# Altium PCB ESP_mudule.pcbdoc (part 3 of 4)
Units mm, origin at the board's own origin, x right, y up, seen from the top; angles counter-clockwise.
Board outline 109.8 x 135.65 mm, 2 copper layers (Top Layer, Bottom Layer); 176 components, 188 nets, 748 pads, 392 vias.
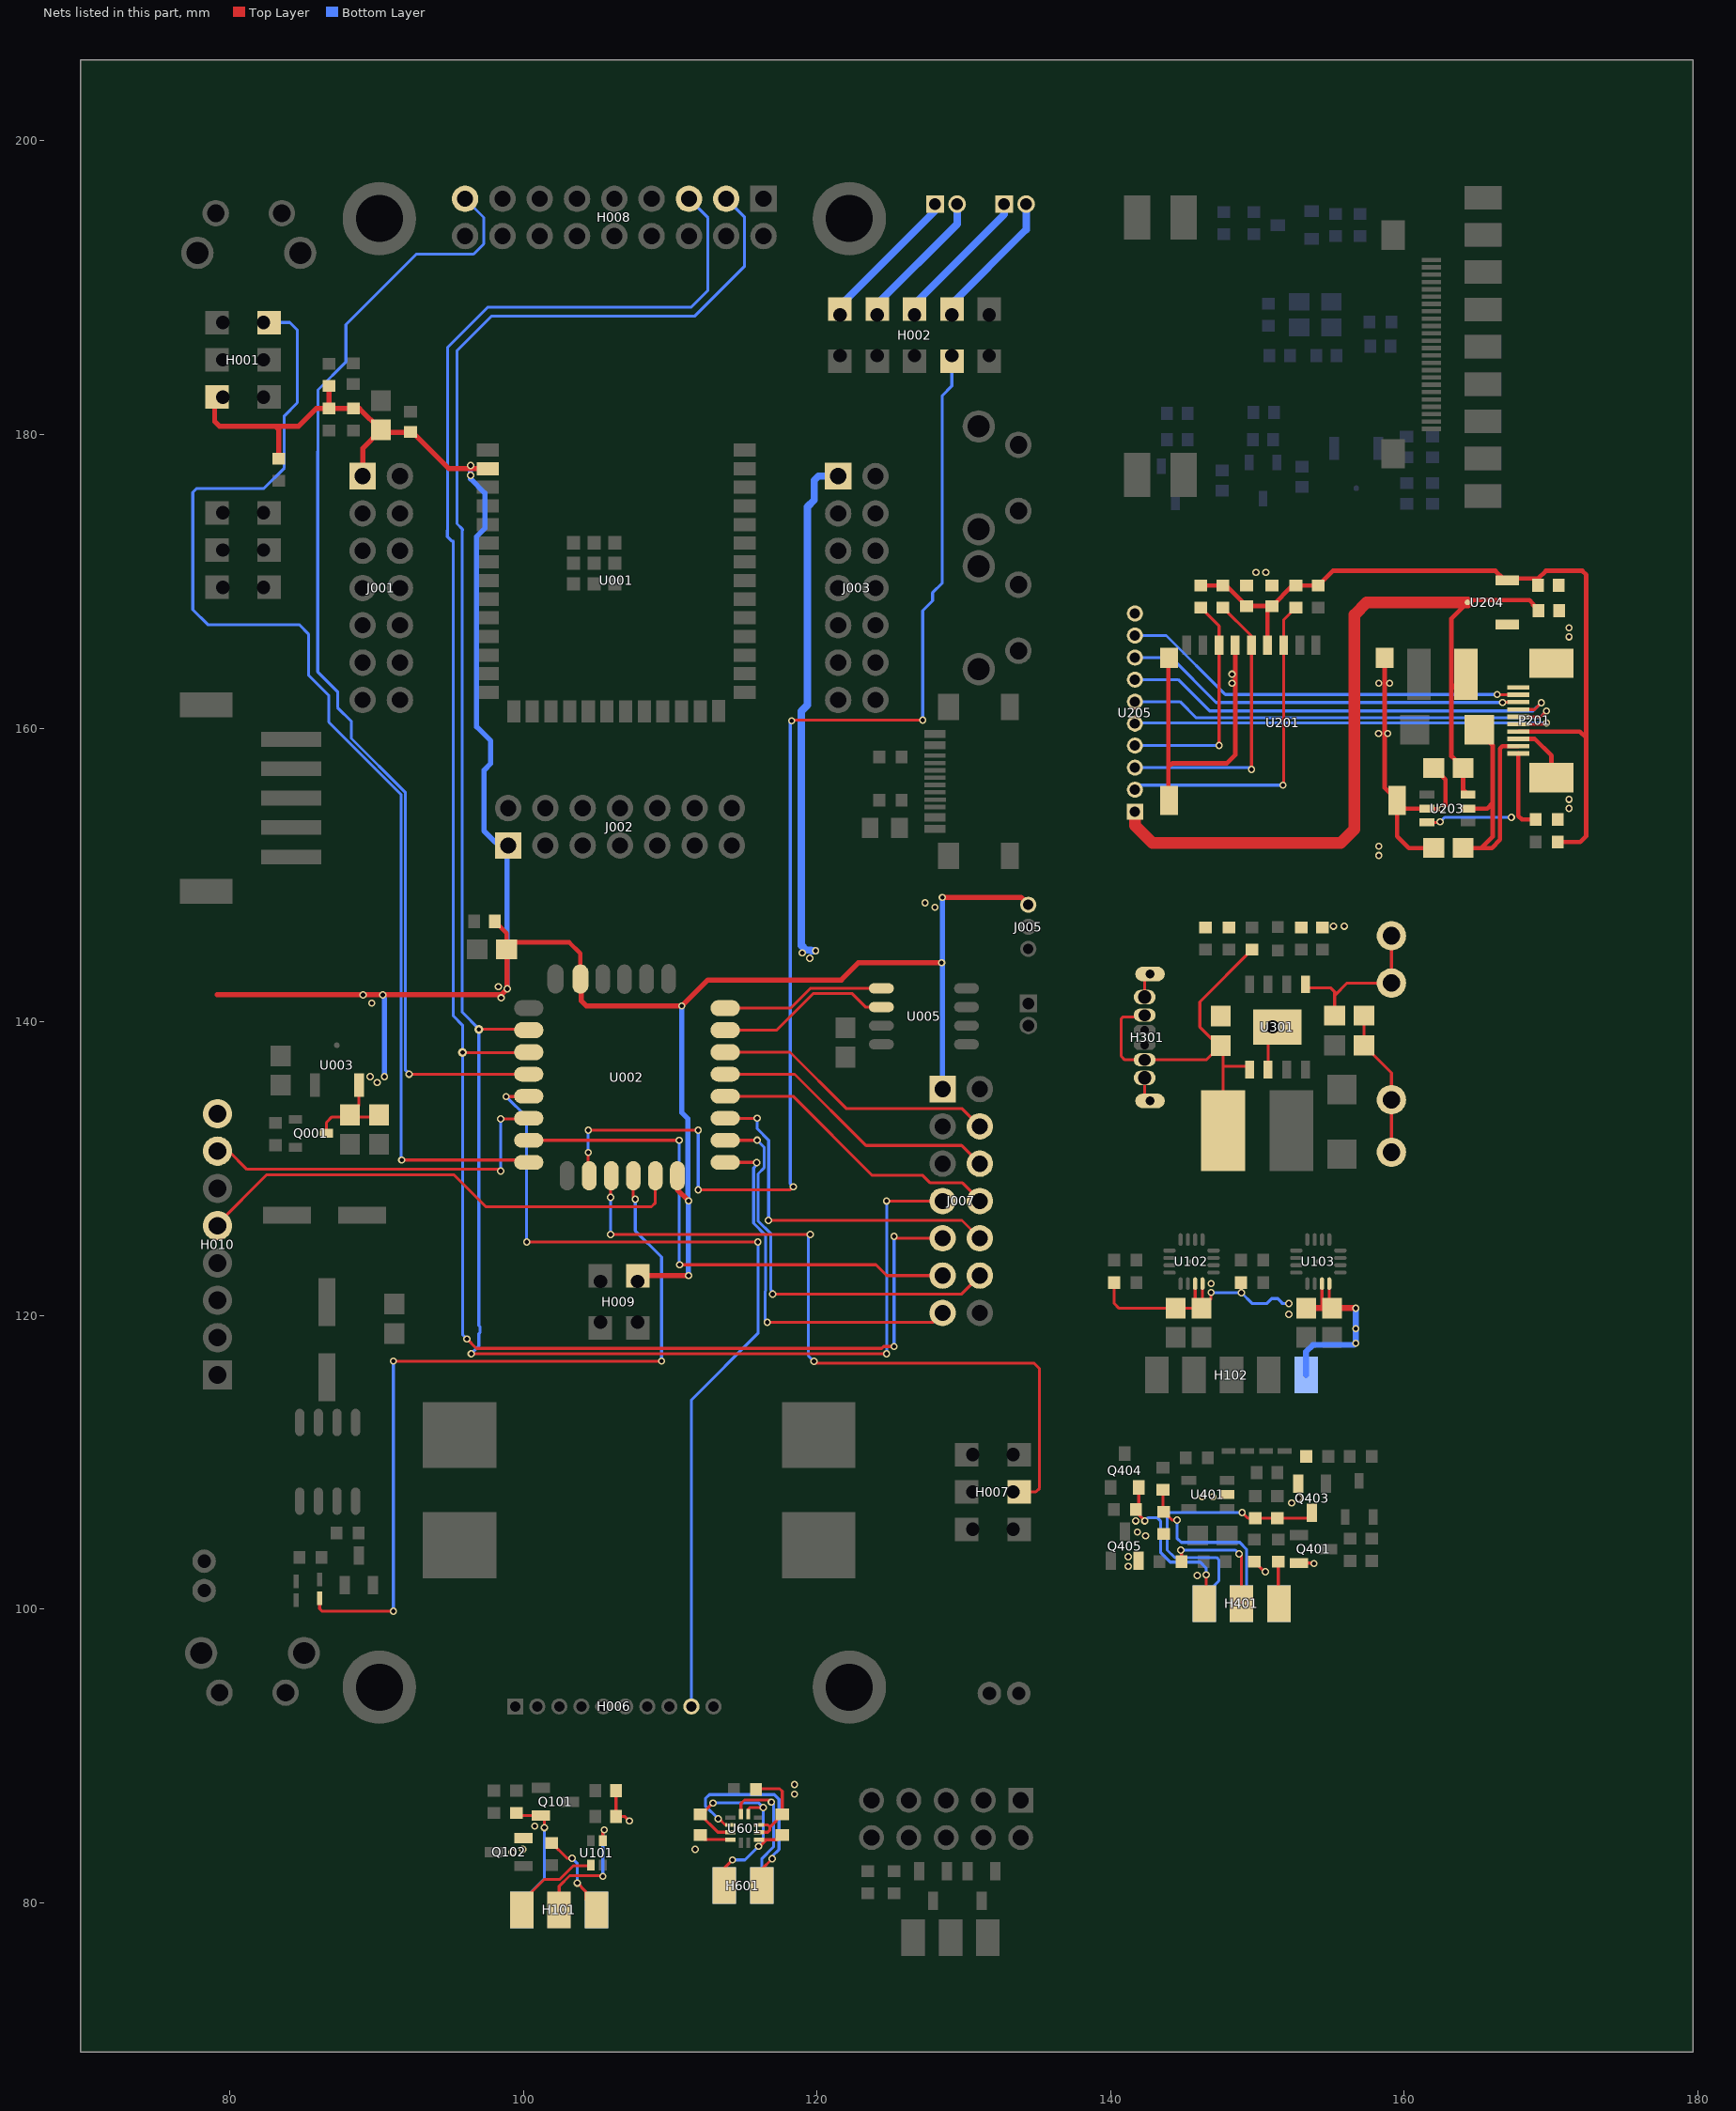
[diagram p3: the nets of this part, all layers, seen from the top]

## Via types
v1: diameter 0.5, hole 0.305, Top Layer to Bottom Layer, 390 vias
v2: diameter 0.61, hole 0.305, Top Layer to Bottom Layer, 2 vias

## Nets (pads, with @x,y where several pads share a name; then routed paths per layer and width w, separated by ;. In a path a pad name is that pad's centre, name@x,y a point inside that pad or via, vN(x,y) a via of type N, cw(c..) or ccw(c..) an arc to the next point about the centre after c; other vN are vias at no path point) (continued)
HT517_VCC: C103.2 C104.2 C105.2 C106.2 H102.10 R105.2 R107.2 U102.7 U102.8 U103.7 U103.8 | length 33.3
  Top Layer w0.2: R105.2@140.235,122.253 140.235,120.826 140.55,120.512 C103.2@144.418,120.512 C104.2@146.196,120.512 ; U102.7@145.755,122.175 145.755,120.953 C104.2@146.196,120.512 ; U102.8@146.255,122.175 C104.2@146.255,120.571 ; v1(146.835,121.57) 146.835,121.151 C104.2@146.255,120.571 ; R107.2@148.871,122.253 148.871,121.58 v1(148.899,121.552) ; 154.368,120.512 154.391,120.534 U103.7@154.391,122.175 ; U103.8@154.891,122.175 154.891,120.707 C106.2@155.086,120.512 ; C104.2@146.196,120.512 C104.2@146.255,120.571
  Top Layer w0.4: C105.2@153.308,120.512 154.368,120.512 C106.2@155.086,120.512 156.683,120.512 v1(156.695,120.499)
  Bottom Layer w0.2: v1(146.835,121.57) 146.853,121.552 v1(148.899,121.552) 149.623,120.828 150.668,120.828 150.668,120.86 150.963,121.154 151.378,121.154 151.672,120.86 151.672,120.828 v1(152.14,120.828)
  Bottom Layer w0.4: H102.10@153.308,115.949 153.308,117.537 153.772,118 156.577,118 v1(156.695,118.119) v1(156.695,119.11) v1(156.695,120.499)
  other v1: 152.14,120.091 146.835,122.182
I2S_EN: H002.7 U002.12 | length 87.3
  Top Layer w0.2: v1(104.422,131.103) 104.422,129.581 U002.12@104.491,129.512 ; v1(104.422,132.627) v1(111.915,132.627) ; v1(111.915,128.563) 118.178,128.563 v1(118.382,128.767) ; v1(118.279,160.503) 118.33,160.554 v1(127.202,160.554)
  Bottom Layer w0.2: v1(104.422,131.103) v1(104.422,132.627) ; v1(111.915,128.563) v1(111.915,132.627) ; v1(118.279,160.503) 118.182,160.406 118.182,128.967 v1(118.382,128.767) ; v1(127.202,160.554) 127.202,167.995 127.875,168.667 127.875,169.224 128.538,169.887 128.538,182.652 129.187,183.3 H002.7@129.187,184.971
INT_02: H008.3 J007.7 U002.4 | length 142.2
  Top Layer w0.2: v1(96.456,117.404) 124.731,117.404 v1(124.742,117.393) ; v2(96.978,139.49) 100.313,139.49 U002.4@100.371,139.432 ; v1(124.742,127.801) J007.7@128.552,127.801
  Bottom Layer w0.2: v1(96.456,117.404) 96.978,117.926 96.978,118.758 97.05,118.83 97.05,119.246 96.978,119.318 v2(96.978,139.49) 96.978,139.519 95.835,140.662 95.835,173.455 95.859,173.479 95.859,173.541 95.484,173.916 95.484,185.711 97.82,188.047 111.663,188.047 115.074,191.459 115.074,194.791 H008.3@113.82,196.045 ; v1(124.742,117.393) v1(124.742,127.801)
INT_03: H008.5 J007.9 U002.5 | length 139
  Top Layer w0.2: v2(95.864,137.909) 100.348,137.909 U002.5@100.371,137.932 ; v1(96.167,118.403) 96.802,117.768 124.407,117.768 124.534,117.895 v1(125.25,117.895) ; v1(125.25,125.388) 125.377,125.261 J007.9@128.552,125.261
  Bottom Layer w0.2: v1(96.167,118.403) 95.864,118.706 v2(95.864,137.909) 95.864,139.779 95.231,140.412 95.231,172.726 95.214,172.743 95.125,172.743 94.831,173.037 94.831,173.453 94.849,173.471 94.849,185.931 97.57,188.651 111.413,188.651 112.575,189.814 112.575,194.75 H008.5@111.28,196.045 ; v1(125.25,117.895) v1(125.25,125.388)
LCD_RESET: H006.9 U002.7 | length 61.3
  Top Layer w0.2: v1(98.834,134.913) 100.352,134.913 U002.7@100.371,134.932 ; v1(100.231,125.007) v1(115.979,125.007)
  Bottom Layer w0.2: v1(98.834,134.913) 100.231,133.516 v1(100.231,125.007) ; H006.9@111.45,93.385 111.45,114.256 115.979,118.784 v1(115.979,125.007)
METAL_ENABLE: H007.3 U002.13 | length 51.7
  Top Layer w0.2: v1(105.946,125.515) v1(119.535,125.515) ; v1(105.946,128.055) 105.946,129.468 U002.13@105.991,129.512 ; v1(119.789,116.883) 119.907,116.764 134.763,116.764 135.156,116.371 135.156,108.243 134.902,107.989 H007.3@133.759,107.989
  Bottom Layer w0.2: v1(105.946,125.515) v1(105.946,128.055) ; v1(119.535,125.515) 119.408,125.388 119.408,117.264 v1(119.789,116.883)
MIC_CLK: H101.3 U101.4 | length 8.9
  Top Layer w0.2: H101.3@102.442,79.53 102.442,81.139 103.164,81.861 105.366,81.861 v1(105.416,81.811) ; U101.4@105.421,84.248 105.421,84.88 v1(105.518,84.977)
  Bottom Layer w0.2: v1(105.416,81.811) 105.416,84.875 v1(105.518,84.977)
MIC_DAT: H101.1 U101.1 | length 6.3
  Top Layer w0.2: H101.1@99.902,79.53 99.902,80.078 101.438,81.614 102.49,81.614 103.416,82.54 104.563,82.54 U101.1@104.601,82.578
MIC_EN: H101.5 R103.2 | length 6
  Top Layer w0.2: R103.2@101.934,84.093 102.985,83.042 v1(103.325,83.042) ; v1(103.682,81.359) 104.243,80.798 104.243,80.269 H101.5@104.982,79.53
  Bottom Layer w0.2: v1(103.325,83.042) 103.682,82.685 v1(103.682,81.359)
MIC_GND: C101.1 C102.1 H101.6 Q102.2 | length 2.8
  Top Layer w0.2: C102.1@106.317,87.658 C101.1@106.317,85.88 106.92,85.88 v1(107.218,85.582)
  other v1: 99.231,83.467 99.959,83.654
MIC_VCC: H101.2 Q101.2 R101.2 | length 8.9
  Top Layer w0.2: R101.2@99.521,86.143 99.718,85.946 Q101.2@101.188,85.946 101.443,85.691 v1(101.443,85.133)
  Bottom Layer w0.2: H101.2@99.902,79.524 99.902,80.129 101.443,81.67 v1(101.443,85.133)
  other v1: 100.775,85.235
P0_CMA_LIGHT: H008.17 U002.6 | length 77.8
  Top Layer w0.2: v1(92.23,136.437) 92.235,136.432 U002.6@100.371,136.432
  Bottom Layer w0.2: v1(92.23,136.437) 91.976,136.691 91.976,155.614 88.293,159.297 88.293,160.463 87.356,161.4 87.356,162.486 86.007,163.835 86.007,178.832 86.021,178.846 86.021,183.037 87.926,184.942 87.926,187.482 92.72,192.275 96.617,192.275 97.31,192.968 97.31,194.775 H008.17@96.04,196.045
P2_3V3: C201.2 C205.2 C206.2 P201.4 R201.1 R202.2 R203.2 R204.2 R225.1 U201.4 U204.3 | length 56.4
  Top Layer w0.3: R204.2@146.131,169.711 R203.2@147.649,169.711 147.869,169.711 C206.2@149.267,168.314 C201.2@150.99,168.314 ; U201.4@150.682,165.638 150.682,168.006 C201.2@150.99,168.314 ; P201.4@167.757,159.768 171.951,159.768 172.386,159.333 ; C205.2@169.107,169.724 169.107,170.19 ; R225.1@170.437,152.243 171.978,152.243 172.386,152.651 172.386,159.333 ; C201.2@150.99,168.314 152.388,169.711 R201.1@154.132,169.711 155.135,170.715 166.206,170.715 166.731,170.19 169.107,170.19 ; 169.107,170.19 169.632,170.715 172.122,170.715 172.386,170.451 172.386,159.333
P2_5V0: C203.2 C204.2 L201.1 U203.6 U204.2 U205.1 | length 60
  Top Layer w0.3: L201.1@164.195,163.668 163.206,162.679 ; U203.6@164.337,155.477 164.002,155.811 C203.2@164.002,157.293 163.206,158.089 163.206,162.679 ; C204.2@169.134,168.01 168.765,168.378 168.765,168.462 168.515,168.712 164.447,168.712 U204.2@164.298,168.564 163.206,167.472 163.206,162.679
  Top Layer w0.8: U205.1@141.657,154.307 141.657,153.369 142.834,152.192 155.675,152.192 156.602,153.12 156.602,167.722 157.443,168.564 U204.2@164.298,168.564
P2_GND: C201.1 C202.1 C203.1 C204.1 C205.1 C206.1 P201.3 P201.10 P201.11 P201.12 R205.1 U201.6 U201.10 U201.11 U201.12 U201.13 U203.2 U204.1 U205.10 | length 48.2
  Top Layer w0.3: U201.11@143.982,155.084 143.933,155.134 143.933,157.348 ; U201.10@143.982,164.787 143.933,164.738 143.933,157.348 ; U201.6@148.483,165.638 148.483,158.175 147.906,157.599 144.183,157.599 143.933,157.348 ; U201.13@158.663,164.787 158.663,155.923 U201.12@159.501,155.084 ; C202.1@162.002,151.835 160.299,151.835 159.501,152.633 U201.12@159.501,155.084 ; C203.1@162.002,157.293 162.794,156.501 162.794,154.738 v1(162.543,154.488) 161.576,154.488 U203.2@161.537,154.527 160.059,154.527 U201.12@159.501,155.084 ; P201.3@167.757,159.268 168.881,159.268 170.017,158.132 P201.11@170.017,156.621
  other v1: 158.259,151.325 158.259,151.962 171.213,154.539 171.213,155.151 158.243,159.639 158.871,159.639 148.263,163.056 158.259,163.056 158.995,163.056 148.263,163.671 171.213,166.218 171.213,166.834 149.894,170.604 150.558,170.604
P2_LCD_ANODE: C202.2 D201.1 P201.2 U203.5 | length 20.9
  Top Layer w0.3: C202.2@164.002,151.835 165.246,151.835 ; U203.5@164.337,154.527 165.642,154.527 166.011,154.896 ; D201.1@165.1,159.894 165.1,159.734 166.011,158.823 166.011,154.896 ; P201.2@167.757,158.767 166.67,158.767 166.521,158.619 166.521,152.396 165.96,151.835 165.246,151.835 ; 165.246,151.835 166.011,152.6 166.011,154.896
P2_LCD_CATHODE: P201.1 R205.2 U203.3 | length 11.4
  Top Layer w0.2: U203.3@161.537,153.577 162.397,153.577 v1(162.441,153.621)
  Top Layer w0.3: P201.1@167.757,158.27 167.757,154.017 168,153.774 R205.2@168.93,153.774
  Bottom Layer w0.2: v1(162.441,153.621) 162.747,153.927 v1(167.286,153.927)
P2_LCD_CS: P201.8 U205.8 | length 27.4
  Top Layer w0.2: v1(166.694,161.746) 166.719,161.77 P201.8@167.757,161.77
  Bottom Layer w0.2: U205.8@141.657,164.805 144.117,164.805 147.176,161.746 v1(166.694,161.746)
P2_LCD_RESET: P201.9 U205.9 | length 27.8
  Top Layer w0.2: v1(166.317,162.291) 166.34,162.268 P201.9@167.757,162.268
  Bottom Layer w0.2: U205.9@141.657,166.306 143.788,166.306 147.804,162.291 v1(166.317,162.291)
P2_LCD_RS: P201.5 U205.5 | length 30
  Top Layer w0.2: P201.5@167.757,160.269 169.593,160.269 v1(169.683,160.359)
  Bottom Layer w0.2: U205.5@141.657,160.307 141.708,160.359 v1(169.683,160.359)
P2_LCD_SCL: P201.7 U205.7 | length 30.5
  Top Layer w0.2: P201.7@167.757,161.269 168.862,161.269 v1(169.324,161.732)
  Bottom Layer w0.2: U205.7@141.657,163.307 144.595,163.307 146.733,161.169 168.761,161.169 v1(169.324,161.732)
P2_LCD_SDA: P201.6 U205.6 | length 30.8
  Top Layer w0.2: P201.6@167.757,160.769 169.284,160.769 v1(169.683,161.169)
  Bottom Layer w0.2: U205.6@141.657,161.805 144.719,161.805 145.817,160.708 169.222,160.708 v1(169.683,161.169)
P2_SD_CLK: R203.1 U201.5 U205.3 | length 19.8
  Top Layer w0.2: R203.1@147.649,168.205 149.583,166.271 U201.5@149.583,165.638 149.589,165.632 v1(149.589,157.191)
  Bottom Layer w0.2: U205.3@141.657,157.307 149.473,157.307 v1(149.589,157.191)
P2_SD_CMD: R202.1 U201.3 U205.2 | length 22.7
  Top Layer w0.2: v1(151.731,156.12) 151.782,156.171 U201.3@151.782,165.638 151.782,167.373 R202.1@152.614,168.205
  Bottom Layer w0.2: U205.2@141.657,155.806 141.97,156.12 v1(151.731,156.12)
P2_SD_DAT: R204.1 U201.7 U205.4 | length 15.6
  Top Layer w0.2: R204.1@146.131,168.205 147.383,166.952 U201.7@147.383,165.638 v1(147.383,158.823)
  Bottom Layer w0.2: U205.4@141.657,158.806 141.674,158.823 v1(147.383,158.823)
P4_GND: H401.6 Q401.2 Q403.2 Q405.2 R405.1 R409.2 R414.1 U401.2 | length 2.1
  Top Layer w0.2: R409.2@149.784,103.244 150.477,102.551 v1(150.534,102.551) ; Q401.2@152.813,103.149 153.812,103.149 v1(153.849,103.112)
  other v1: 141.201,102.922 141.201,103.571 142.374,104.999 141.813,105.254 152.319,107.243 152.828,107.585 146.238,107.657 146.942,107.657
P4_L_CATHODE: H401.2 Q403.3 R406.1 R407.2 | length 19.9
  Top Layer w0.2: v1(148.953,106.589) 149.341,106.202 R406.1@149.835,106.202 R407.2@151.365,106.202 153.345,106.202 Q403.3@153.711,106.567
  Bottom Layer w0.2: H401.2@146.373,100.382 146.373,100.94 147.372,101.939 147.372,103.367 147.219,103.52 144.363,103.52 143.853,104.03 143.853,106.478 143.965,106.589 v1(148.953,106.589)
P4_METAL_ADC: H401.4 R413.1 R414.2 | length 12.8
  Top Layer w0.2: R413.1@143.562,108.14 143.562,106.688 R414.2@143.613,106.637 144.18,106.07 v1(144.516,106.07)
  Bottom Layer w0.2: v1(144.516,106.07) 144.516,104.846 144.808,104.555 148.788,104.555 149.259,104.084 149.259,100.728 H401.4@148.913,100.382
P4_METAL_EN: H401.3 R412.1 | length 8.4
  Top Layer w0.2: v1(144.771,104.03) 144.825,103.976 R412.1@144.825,103.232 ; v1(148.749,103.775) 148.913,103.611 H401.3@148.913,100.388
  Bottom Layer w0.2: v1(144.771,104.03) 148.494,104.03 v1(148.749,103.775)
P4_METAL_PULSE: H401.5 R401.1 | length 2.9
  Top Layer w0.2: R401.1@151.416,103.244 151.416,100.426 H401.5@151.453,100.388
P4_VCC: H401.1 Q404.2 R411.1 | length 12
  Top Layer w0.2: Q404.2@141.911,108.304 141.911,106.999 R411.1@141.714,106.802 141.714,106.628 v1(142.323,106.019) ; H401.1@146.373,100.388 146.505,100.521 v1(146.505,102.347)
  Bottom Layer w0.2: v1(142.323,106.019) 142.527,106.223 143.19,106.223 143.394,106.019 143.394,103.877 144.057,103.214 146.097,103.214 146.505,102.806 v1(146.505,102.347)
  other v1: 145.893,102.296 141.711,106.019
P6_3V3: C601.1 C602.2 H601.1 U601.3 U601.7 U601.11 | length 18.1
  Top Layer w0.2: v1(112.911,86.808) 112.125,86.021 C601.1@112.049,86.021 113.253,84.817 U601.3@114.096,84.817 ; H601.1@113.696,81.189 113.696,82.381 v1(114.248,82.933) ; U601.11@115.321,86.042 115.321,86.402 115.418,86.5 v1(116.342,86.5) ; v1(116.025,83.859) 116.107,83.859 116.557,84.31 ; U601.7@116.046,84.317 116.053,84.31 116.557,84.31 ; C602.2@117.637,84.621 117.326,84.31 116.557,84.31
  Bottom Layer w0.2: v1(112.911,86.808) 116.035,86.808 v1(116.342,86.5) 116.342,84.176 v1(116.025,83.859) 115.099,82.933 v1(114.248,82.933)
P6_GND: C601.2 C602.1 H601.2 R601.1 U601.4 U601.8 U601.9 | length 8.7
  Top Layer w0.2: C601.2@112.049,84.621 112.353,84.317 U601.4@114.096,84.317 ; R601.1@115.851,87.734 115.895,87.778 117.461,87.778 117.637,87.602 C602.1@117.637,86.021 116.798,85.182 116.798,85.177 ; U601.8@116.046,84.817 116.642,84.817 116.798,84.973 116.798,85.177 ; U601.9@116.046,85.317 116.658,85.317 116.798,85.177
  other v1: 111.698,83.647 118.47,87.412 118.47,88.073
PDM_EN: H001.5 U002.10 | length 82.5
  Top Layer w0.2: v1(91.722,130.595) 100.208,130.595 U002.10@100.371,130.432
  Bottom Layer w0.2: H001.5@82.705,187.618 84.102,187.618 84.61,187.11 84.61,182.157 83.721,181.268 83.721,177.712 82.324,176.315 77.752,176.315 77.498,176.061 77.498,168.067 78.52,167.044 84.737,167.044 85.372,166.409 85.372,163.615 86.752,162.235 86.752,160.411 91.674,155.489 91.674,130.643 v1(91.722,130.595)
POWER_LOCK: D001.2 U002.14 | length 54.5
  Top Layer w0.2: D001.2@86.134,100.75 86.134,100.039 86.31,99.863 v1(91.155,99.863) ; v1(91.155,116.897) v1(109.413,116.897) ; U002.14@107.491,129.512 107.491,128.051 v1(107.628,127.913)
  Bottom Layer w0.2: v1(91.155,99.863) v1(91.155,116.897) ; v1(107.628,127.913) 107.628,125.771 109.413,123.986 v1(109.413,116.897)
PWM_07: J007.11 U002.9 | length 36.9
  Top Layer w0.2: U002.9@100.371,131.932 v1(110.621,131.932) ; v1(110.645,123.46) 124.015,123.46 124.754,122.721 J007.11@128.552,122.721
  Bottom Layer w0.2: v1(110.621,131.932) 110.621,123.484 v1(110.645,123.46)
PWM_08: J007.13 U002.20 | length 25.7
  Top Layer w0.2: U002.20@113.751,130.432 115.883,130.432 v1(115.898,130.417) ; v1(116.614,119.546) 127.917,119.546 J007.13@128.552,120.181
  Bottom Layer w0.2: v1(115.898,130.417) 115.898,130.267 115.686,130.055 115.686,126.289 116.493,125.482 116.493,121.681 116.471,121.659 116.471,119.689 v1(116.614,119.546)
PWM_09: J007.12 U002.21 | length 28.1
  Top Layer w0.2: U002.21@113.751,131.932 115.935,131.932 v1(115.926,131.941) ; v1(116.973,121.451) 129.822,121.451 J007.12@131.092,122.721
  Bottom Layer w0.2: v1(115.926,131.941) 116.4,131.467 116.4,130.055 115.992,129.647 115.992,126.434 116.859,125.567 116.859,121.742 116.973,121.628 v1(116.973,121.451)
PWM_010: J007.10 U002.22 | length 24.4
  Top Layer w0.2: U002.22@113.751,133.432 115.917,133.432 v1(115.925,133.44) ; v1(116.686,126.485) 129.868,126.485 J007.10@131.092,125.261
  Bottom Layer w0.2: v1(115.925,133.44) 115.925,132.723 116.706,131.942 v1@116.706,126.465 ; v1(116.686,126.485) v1@116.706,126.465 ; v1@116.706,126.434 v1@116.706,126.465
PWM_011: J007.8 U002.23 | length 20.3
  Top Layer w0.2: U002.23@113.751,134.932 118.373,134.932 123.76,129.545 127.212,129.545 127.722,129.035 129.915,129.035 131.092,127.858 J007.8@131.092,127.801
PWM_012: J007.6 U002.24 | length 19.9
  Top Layer w0.2: U002.24@113.751,136.432 118.489,136.432 123.336,131.585 129.848,131.585 J007.6@131.092,130.341
PWM_013: J007.4 U002.25 | length 19.4
  Top Layer w0.2: U002.25@113.751,137.932 118.162,137.932 122.01,134.084 129.889,134.084 J007.4@131.092,132.881
PWM_014: U002.26 U005.2 | length 12.1
  Top Layer w0.2: U002.26@113.751,139.432 117.26,139.432 119.766,141.938 122.367,141.938 123.296,141.009 U005.2@124.381,141.009
PWM_015: U002.27 U005.1 | length 11.2
  Top Layer w0.2: U002.27@113.751,140.932 118.199,140.932 119.546,142.279 U005.1@124.381,142.279
RC522_IRQ: H010.5 U002.15 | length 34.2
  Top Layer w0.2: H010.5@79.181,126.117 79.181,126.241 82.519,129.579 95.278,129.579 97.449,127.408 108.728,127.408 108.991,127.671 U002.15@108.991,129.512
RC522_RST: H010.7 U002.8 | length 25.3
  Top Layer w0.2: H010.7@79.181,131.197 79.944,131.197 81.181,129.96 98.326,129.96 v1(98.453,129.833) ; v1(98.453,133.389) 100.328,133.389 U002.8@100.371,133.432
  Bottom Layer w0.2: v1(98.453,129.833) v1(98.453,133.389)
SC7A20_SCL: H601.4 U601.12 | length 9
  Top Layer w0.2: U601.12@114.821,86.042 114.821,86.77 115.064,87.013 116.751,87.013 v1(116.895,86.87)
  Bottom Layer w0.2: H601.4@116.236,81.183 116.236,83.003 117.05,83.817 117.05,84.207 117.045,84.212 117.045,86.719 v1(116.895,86.87)
SC7A20_SDA: H601.3 U601.2 | length 14.3
  Top Layer w0.2: v1(113.271,85.738) 113.328,85.738 113.749,85.317 U601.2@114.096,85.317 ; H601.3@116.236,81.189 116.236,82.293 v1(116.952,83.009)
  Bottom Layer w0.2: v1(113.271,85.738) 112.403,86.606 112.403,87.106 112.677,87.379 117.095,87.379 117.41,87.064 117.41,83.647 116.952,83.189 v1(116.952,83.009)
SPK1_N: H002.4 H004.2 | length 9.4
  Bottom Layer w0.5: H002.4@124.107,188.527 124.107,188.888 129.547,194.329 H004.2@129.547,195.682
SPK1_P: H002.2 H004.1 | length 9.8
  Bottom Layer w0.5: H002.2@121.567,188.527 121.567,188.761 128.047,195.242 H004.1@128.047,195.681
SPK2_N: H002.8 H005.2 | length 9.3
  Bottom Layer w0.5: H002.8@129.187,188.527 129.187,188.888 134.246,193.948 H005.2@134.246,195.682
SPK2_P: H002.6 H005.1 | length 9.7
  Bottom Layer w0.5: H002.6@126.647,188.527 126.647,188.888 132.746,194.988 H005.1@132.746,195.681
USB+: C301.1 H301.2 H301.5 L301.2 R301.2 U301.1 | length 28
  Top Layer w0.2: H301.5@142.314,140.453 142.187,140.326 140.825,140.326 140.714,140.214 140.714,137.664 140.966,137.412 H301.2@142.314,137.412 146.506,137.412 C301.1@147.487,138.393 ; L301.2@147.661,132.584 147.661,136.967 ; U301.1@149.452,136.745 149.23,136.967 147.661,136.967 ; R301.2@149.629,144.914 146.069,141.354 146.069,139.653 147.329,138.393 C301.1@147.487,138.393 ; C301.1@147.487,138.393 147.661,138.219 147.661,136.967
USB-: C301.2 C302.2 C303.2 H301.1 H301.6 H301.7 H301.8 H304.1 H305.1 pad.1 R302.1 R303.1 R304.1 R305.1 U301.2 U301.9 | length 16.7
  Top Layer w0.2: H301.1@142.314,136.183 142.314,134.984 H301.7@142.685,134.613 ; H301.6@142.314,141.682 142.314,142.884 H301.8@142.685,143.254 ; U301.2@150.722,136.745 150.722,139.018 U301.9@151.357,139.653 ; C303.2@157.253,140.426 C302.2@157.253,138.394 159.122,136.525 H304.1@159.122,134.693 H305.1@159.122,131.123
  other v1: 155.175,146.513 155.909,146.513
VBIN: C303.1 H302.1 H303.1 U301.5 | length 11.3
  Top Layer w0.2: U301.5@153.262,142.561 153.517,142.305 154.994,142.305 155.253,142.047 155.253,141.797 ; C303.1@155.253,140.426 155.253,141.797 ; H302.1@159.122,145.858 H303.1@159.122,142.644 156.1,142.644 155.253,141.797
VCC: C001.1 C002.1 C004.2 C005.2 C008.2 C009.2 H001.2 H009.1 H010.8 J001.1 J002.1 J003.1 J005.1 J007.1 Q001.3 R001.2 R005.2 R006.2 R007.2 U001.2 U002.17 U002.35 U003.3 | length 218.4
  Top Layer w0.2: Q001.3@86.591,132.407 86.591,133.142 86.973,133.523 90.039,133.523 C009.2@90.177,133.662 ; C008.2@88.188,133.662 88.804,134.277 U003.3@88.804,135.694
  Top Layer w0.3: C005.2@98.053,146.839 98.861,146.031 C004.2@98.861,144.934 99.343,145.416 103.13,145.416 103.891,144.656 U002.35@103.891,142.912
  Top Layer w0.35: H001.2@79.149,182.538 78.982,182.371 78.982,180.887 79.323,180.546 83.149,180.546 ; 79.17,141.836 v1(89.082,141.836) v1(90.441,141.836) 98.499,141.836 v1(98.907,142.244) 98.907,144.889 C004.2@98.861,144.934 ; R007.2@83.34,178.339 83.34,180.355 83.149,180.546 ; R001.2@86.769,183.309 R005.2@86.769,181.768 ; J001.1@89.059,177.158 89.059,179.043 C001.1@90.316,180.3 ; U001.2@97.581,177.671 94.938,177.671 92.484,180.125 90.491,180.125 C001.1@90.316,180.3 ; U002.35@103.891,142.912 103.956,142.847 103.956,141.428 104.297,141.087 v1(110.79,141.087) 110.806,141.087 112.575,142.856 121.653,142.856 122.826,144.029 v1(128.487,144.029) ; H009.1@107.79,122.721 v1(111.249,122.721) ; U002.17@110.491,129.512 110.491,128.57 v1(111.249,127.811) ; v1(128.537,148.475) 133.888,148.475 J005.1@134.394,147.969 ; 83.149,180.546 84.678,180.546 85.9,181.768 R005.2@86.769,181.768 ; R005.2@86.769,181.768 R006.2@88.42,181.768 88.849,181.768 C001.1@90.316,180.3
  Bottom Layer w0.35: v1(90.441,141.836) 90.543,141.734 v1(90.543,136.277) ; v1(96.408,177.88) v1(96.408,177.21) 96.408,176.976 97.377,176.007 97.377,173.61 96.816,173.049 96.816,160.095 97.785,159.126 97.785,157.596 97.326,157.137 97.326,153.005 J002.1@98.907,151.424 ; v1(98.907,142.244) J002.1@98.907,151.424 ; J002.1@98.965,152.012 98.907,151.954 J002.1@98.907,151.424 ; v1(110.79,141.087) 110.79,133.829 111.198,133.421 111.198,127.862 v1(111.249,127.811) v1(111.249,122.721) ; v1(128.487,144.029) v1@128.552,143.965 ; v1(128.537,148.475) 128.552,148.46 v1@128.552,143.965 ; J007.1@128.552,135.421 v1@128.552,143.965
  Bottom Layer w0.5: v1(119.906,144.845) 119.617,144.845 119.577,144.885 119.271,144.885 118.965,145.191 118.931,145.191 118.931,161.151 119.351,161.571 119.351,175.073 119.814,175.536 119.814,176.874 120.098,177.158 J003.1@121.444,177.158
  other v1: 90.057,135.869 89.574,136.277 89.676,141.275 98.499,141.634 98.295,142.397 119.511,144.335 119.001,144.692 128.028,147.803 127.365,148.109
pads on no net: H001.4 H012.A8 H012.B8 H101.4 H501.1 H501.23 H501.24 S002.3 S002.4 U102.5 U102.6 U102.12 U102.13 U103.5 U103.6 U103.12 U103.13 U201.1 U201.8 U201.9 U601.5 U601.6 U601.10

## Polygon pours and split planes (outlines as drawn)
P2_5V0 on Top Layer (solid, remove dead copper, pour order 0): 22 vertices, not listed, extent 162.488,155.202 165.45,168.564
P2_GND on Bottom Layer (solid, remove dead copper, pour order 240): 173.194,171.165 139.389,171.165 139.389,150.713 172.998,150.713 173.202,150.509 173.202,170.859 173.304,170.961 173.304,171.055
$3N1120 on Top Layer (solid, remove dead copper, pour order 2): 162.033,155.202 162.033,156.069 161.217,156.069 161.013,156.273 161.013,158.16 161.727,158.874 161.727,165.504 160.103,165.504 160.103,161.534 159.636,161.067 159.636,157.089 160.605,156.12 160.605,155.202
CAM_5V0 on Bottom Layer (solid, remove dead copper, pour order 242): 162.384,175.647 157.977,175.647 157.648,175.976 155.754,175.976 155.754,174.244 162.391,174.244 162.391,175.641
CAM_3V3 on Bottom Layer (solid, remove dead copper, pour order 244): 37 vertices, not listed, extent 144.075,174.831 162.384,181.155
P2_LCD_ANODE on Top Layer (solid, remove dead copper, pour order 4): 28 vertices, not listed, extent 163.257,151.172 166.67,160.914
P2_LCD_CATHODE on Top Layer (solid, remove dead copper, pour order 6): 169.326,154.233 168.357,154.233 168.255,154.335 168.255,157.803 168.51,158.058 168.51,158.331 167.05,158.331 167.031,158.313 167.031,153.417 167.133,153.315 169.33,153.315 169.33,154.229
CAM_2V8 on Bottom Layer (solid, remove dead copper, pour order 246): 151.623,177.534 151.623,181.308 152.082,181.767 152.082,182.175 150.65,182.175 150.65,177.541 150.656,177.534
P2_GND on Top Layer (solid, remove dead copper, pour order 8): 33 vertices, not listed, extent 157.953,151.019 163.002,165.555
CAM_1V2 on Bottom Layer (solid, remove dead copper, pour order 248): 145.698,177.239 145.698,183.807 144.823,183.807 144.823,177.395 144.98,177.239
$6N1887 on Bottom Layer (solid, remove dead copper, pour order 250): 147.288,193.243 148.308,193.243 148.461,193.396 148.461,194.008 148.837,194.384 150.38,194.384 150.909,193.855 151.878,193.855 151.929,193.804 151.929,195.385 151.776,195.538 149.277,195.538 147.798,194.059 147.288,194.059
P2_3V3 on Top Layer (solid, remove dead copper, pour order 10): 30 vertices, not listed, extent 166.164,151.784 172.896,170.91
P2_5V0 on Top Layer (solid, remove dead copper, pour order 12): 165.11,169.204 166.447,169.204 166.47,169.227 167.592,169.227 167.898,168.921 169.377,168.921 169.53,168.768 169.53,167.561 168.289,167.561 167.796,168.054 165.858,168.054 165.756,167.952 165.11,168.598
CAM_3V3 on Bottom Layer (solid, remove dead copper, pour order 252): 28 vertices, not listed, extent 146.013,175.622 153.561,187.879
P2_GND on Top Layer (solid, remove dead copper, pour order 14): 171.519,153.315 171.519,158.823 171.074,159.268 168.664,159.268 168.664,157.803 168.51,157.65 168.51,154.998 168.561,154.947 169.785,154.947 170.04,154.692 170.04,153.315
$6N2239 on Bottom Layer (solid, remove dead copper, pour order 254): 155.805,184.878 155.805,186.868 156.111,187.174 158.049,187.174 158.049,188.122 156.345,188.122 156.162,187.939 154.335,187.939 154.335,186.672 154.326,186.664 154.335,186.664 154.998,186 154.998,184.883 155.003,184.878
CAM_GND on Bottom Layer (solid, remove dead copper, pour order 256): 147.186,177.126 150.042,177.126 150.144,177.228 150.144,182.022 148.276,182.022 148.276,179.185 147.135,178.044 147.135,177.177
P2_GND on Top Layer (solid, remove dead copper, pour order 16): 171.366,170.196 171.519,170.043 171.519,163.056 171.111,162.648 167.029,162.648 167.029,165.761 166.164,166.626 166.164,167.34 166.266,167.442 167.745,167.442 167.949,167.238 169.887,167.238 170.091,167.442 170.091,170.196
P2_3V3 on Top Layer (solid, remove dead copper, pour order 18): 28 vertices, not listed, extent 145.657,164.943 166.317,170.91
CAM_GND on Bottom Layer (solid, remove dead copper, pour order 258): 142.986,177.239 144.136,177.239 144.228,177.33 144.228,182.532 144.177,182.583 143.004,182.583 142.953,182.634 142.953,177.33 143.004,177.279 143.004,177.257
P2_GND on Top Layer (solid, remove dead copper, pour order 20): 151.476,169.329 151.476,170.91 148.824,170.91 148.824,169.329
CAM_GND on Bottom Layer (solid, remove dead copper, pour order 260): 152.592,177.432 154.734,177.432 155.55,178.248 155.55,179.848 152.815,179.848 152.592,179.625
P2_GND on Top Layer (solid, remove dead copper, pour order 22): 24 vertices, not listed, extent 140.919,154.08 148.773,168.528
CAM_GND on Bottom Layer (solid, remove dead copper, pour order 262): 159.681,176.259 162.384,176.259 162.384,178.809 162.333,178.86 159.681,178.86
CAM_5V0 on Top Layer (solid, remove dead copper, pour order 24): 166.617,176.616 164.016,176.616 162.435,175.035 142.851,175.035 142.698,175.188 142.698,196.303 140.862,196.303 140.862,174.191 163.453,174.191 163.453,174.826 166.572,174.826 166.617,174.78
CAM_GND on Bottom Layer (solid, remove dead copper, pour order 264): 17 vertices, not listed, extent 151.711,183.45 158.202,186.613
CAM_GND on Top Layer (solid, remove dead copper, pour order 26): 29 vertices, not listed, extent 140.658,174.168 166.755,197.59
CAM_GND on Bottom Layer (solid, remove dead copper, pour order 266): 25 vertices, not listed, extent 153.102,188.287 166.821,197.58
HT517_VCC on Bottom Layer (solid, remove dead copper, pour order 268): 152.446,114.626 152.446,118.051 152.599,118.204 155.812,118.204 156.169,118.561 156.169,120.958 156.22,121.009 157.228,121.009 157.228,117.427 157.138,117.337 154.324,117.337 154.324,114.626
HT517_VCC on Top Layer (solid, remove dead copper, pour order 28): 152.446,119.785 155.845,119.785 156.119,119.512 156.119,117.336 156.169,117.286 157.138,117.286 157.24,117.388 157.24,121.067 155.907,121.067 155.812,121.162 155.149,121.162 155.047,121.264 152.446,121.264
HT517_VCC on Top Layer (solid, remove dead copper, pour order 30): 151.834,119.785 151.834,121.264 152.612,121.264 152.612,120.078 152.701,119.989 152.497,119.785
HT517_VCC on Bottom Layer (solid, remove dead copper, pour order 270): 152.446,119.836 150.405,119.836 149.538,120.703 146.718,120.703 146.553,120.869 146.553,122.359 146.58,122.386 148.97,122.386 150.092,121.264 152.446,121.264
HT517_VCC on Top Layer (solid, remove dead copper, pour order 32): 143.571,119.785 146.937,119.785 147.141,119.989 147.141,122.437 146.682,122.437 146.631,122.386 146.58,122.437 146.427,122.437 146.427,121.519 146.294,121.386 143.642,121.386 143.571,121.315
HT517_GND on Bottom Layer (solid, remove dead copper, pour order 272): 139.236,117.353 142.077,117.353 142.143,117.286 142.143,126.263 142.194,126.314 139.287,126.314 139.236,126.263
HT517_GND on Top Layer (solid, remove dead copper, pour order 34): 19 vertices, not listed, extent 149.793,114.636 155.784,121.57
HT517_GND on Bottom Layer (solid, remove dead copper, pour order 274): 157.245,126.37 139.211,126.37 139.211,117.312 139.236,117.286 143.418,117.286 144.081,117.949 152.236,117.949 152.649,117.537 157.245,117.537
HT517_GND on Top Layer (solid, remove dead copper, pour order 36): 25 vertices, not listed, extent 139.236,117.353 147.602,126.365
P4_VCC on Bottom Layer (solid, remove dead copper, pour order 276): 141.405,106.376 143.598,106.376 143.649,106.325 143.649,103.979 144.396,103.232 147.033,103.232 147.066,103.265 147.066,101.939 145.34,101.939 145.34,102.356 142.903,102.356 142.903,105.694 142.833,105.764 141.414,105.764 141.405,105.773
$4N873 on Top Layer (solid, remove dead copper, pour order 38): 154.105,104.489 154.105,103.775 154.207,103.673 155.533,103.673 155.686,103.52 155.686,102.908 155.737,102.857 158.185,102.857 158.287,102.959 158.287,103.571 158.185,103.673 156.3,103.673 155.508,104.465 154.128,104.465
P4_GND on Bottom Layer (solid, remove dead copper, pour order 278): 158.594,102.35 158.594,111.424 158.542,111.476 158.464,111.398 139.232,111.398 139.232,102.429 139.263,102.398 150.126,102.398 150.579,101.945 150.579,98.947 152.456,98.947 152.523,98.879 152.523,102.245 152.628,102.35
$4N908 on Top Layer (solid, remove dead copper, pour order 40): 157.675,108.518 157.675,106.988 157.573,106.886 157.573,105.458 157.369,105.254 157.369,104.37 158.218,104.37 158.287,104.438 158.287,108.467 158.236,108.518
$6N1935 on Bottom Layer (solid, remove dead copper, pour order 280): 153.102,194.569 157.386,194.569 157.437,194.62 157.437,195.487 155.091,195.487 154.938,195.64 153.153,195.64 153.102,195.589
$4N875 on Top Layer (solid, remove dead copper, pour order 42): 155.635,106.835 155.635,105.611 155.839,105.407 155.839,104.438 155.89,104.387 156.741,104.387 156.741,105.371 156.298,105.815 156.298,106.835
$6N1076 on Bottom Layer (solid, remove dead copper, pour order 282): 150.042,188.5 151.827,188.5 151.929,188.398 153.55,188.398 153.55,189.662 153.561,189.673 150.042,189.673
$4N877 on Top Layer (solid, remove dead copper, pour order 44): 158.185,110.864 158.185,109.946 157.216,108.977 157.216,108.161 156.621,108.161 156.621,109.346 157.369,110.093 157.369,110.864
USB- on Bottom Layer (solid, remove dead copper, pour order 284): 139.235,129.377 160.91,129.377 160.91,147.456 160.961,147.507 139.235,147.507 139.235,129.606 139.286,129.555 139.286,129.428
$4N879 on Top Layer (solid, remove dead copper, pour order 46): 154.462,110.915 154.411,110.864 154.411,109.385 154.309,109.283 154.309,107.93 155.023,107.93 155.023,109.793 155.227,109.997 156.677,109.997 156.677,110.915
P6_GND on Bottom Layer (solid, remove dead copper, pour order 286): 114.501,79.701 114.503,79.703 114.503,82.5 117.488,82.5 117.512,82.525 117.512,83.035 119.026,83.035 119.026,88.527 119.093,88.594 110.984,88.594 110.996,83.086 112.361,83.086 112.463,82.984 112.463,79.701
P4_GND on Top Layer (solid, remove dead copper, pour order 48): 153.711,110.859 152.778,110.859 152.778,109.793 152.421,109.436 152.421,107.93 153.109,107.93 153.135,107.957 153.135,109.198 153.711,109.773
MIC_VCC on Bottom Layer (solid, remove dead copper, pour order 288): 101.693,81.665 100.535,80.507 99.995,80.507 99.806,80.696 100.52,81.41 100.52,85.49 100.571,85.541 101.693,85.541
$4N893 on Top Layer (solid, remove dead copper, pour order 50): 152.32,110.966 151.401,110.966 151.401,110.675 151.044,110.318 151.044,110.303 150.942,110.201 150.942,107.345 150.891,107.294 151.804,107.294 151.804,109.991 152.319,110.507 152.319,110.966
MIC_GND on Bottom Layer (solid, remove dead copper, pour order 290): 104.337,78.133 104.337,80.739 104.396,80.798 97.307,80.798 97.103,81.002 97.103,88.805 97.154,88.856 107.903,88.856 107.903,80.927 106.208,80.927 106.078,80.797 106.078,78.133
$4N908 on Top Layer (solid, remove dead copper, pour order 52): 148.913,111.017 148.862,110.966 148.8,110.966 148.8,109.895 148.851,109.844 149.31,109.844 149.412,109.946 149.412,110.303 149.769,110.66 150.993,110.66 150.993,110.915 151.044,110.966 149.004,110.966 148.953,111.017
DEBUG_5V0 on Bottom Layer (solid, remove dead copper, pour order 292): 21 vertices, not listed, extent 125.708,79.235 134.735,85.304
$4N926 on Top Layer (solid, remove dead copper, pour order 54): 150.33,109.793 149.565,109.793 149.463,109.691 147.559,109.691 147.167,110.083 147.167,110.801 146.239,110.801 146.199,110.762 146.199,109.589 147.321,108.467 148.443,108.467 148.851,108.875 150.33,108.875
DEBUG_GND on Bottom Layer (solid, remove dead copper, pour order 294): 130.77,76.2 130.77,79.146 130.644,79.235 125.249,79.235 125.198,79.286 125.249,79.337 125.249,79.592 121.997,79.592 121.997,88.63 135.97,88.63 135.97,79.603 132.926,79.603 132.926,76.2
$4N903 on Top Layer (solid, remove dead copper, pour order 56): 144.567,110.762 144.567,110.252 144.363,110.048 143.114,110.048 143.088,110.023 143.088,109.13 144.443,109.13 144.68,108.893 144.68,108.507 144.72,108.467 145.842,108.467 145.842,110.66 145.74,110.762
+5V on Bottom Layer (solid, remove dead copper, pour order 296): 92.022,114.755 92.124,114.653 93.654,114.653 93.756,114.755 93.756,126.026 93.654,126.128 92.022,126.128
P4_L_CATHODE on Top Layer (solid, remove dead copper, pour order 58): 154.053,107.192 153.339,107.192 152.778,106.631 149.493,106.631 149.169,106.955 148.767,106.955 148.698,106.886 148.698,106.376 149.278,105.797 153.984,105.797 154.053,105.866
+5V on Bottom Layer (solid, remove dead copper, pour order 298): 125.901,118.937 125.901,103.571 126.192,103.28 128.079,103.28 128.13,103.331 128.13,117.713 126.906,118.937
$4N898 on Top Layer (solid, remove dead copper, pour order 60): 148.443,107.192 147.321,107.192 147.219,107.09 147.219,102.908 147.321,102.806 148.254,102.806 148.254,104.086 148.494,104.326 150.235,104.326 150.235,105.145 150.177,105.203 149.106,105.203 148.455,105.855 148.455,106.07 148.443,106.081
+5V on Bottom Layer (solid, remove dead copper, pour order 300): 25 vertices, not listed, extent 125.835,106.85 128.334,183.453
$4N908 on Top Layer (solid, remove dead copper, pour order 62): 144.355,108.067 144.363,108.059 144.363,107.141 144.924,106.58 144.924,104.591 145.791,103.724 145.791,102.806 146.763,102.806 146.763,106.271 144.967,108.067
+5V on Bottom Layer (solid, remove dead copper, pour order 302): 132.975,104.606 132.975,93.488 133.077,93.386 134.556,93.386 134.607,93.437 134.607,106.238
$4N1499 on Top Layer (solid, remove dead copper, pour order 64): 139.263,102.704 139.263,104.438 139.314,104.489 143.604,104.489 143.853,104.239 143.853,102.43 142.903,102.43 142.833,102.5 142.833,103.979 142.731,104.081 142.578,104.081 142.527,104.132 140.961,104.132 140.561,103.732 140.561,102.704
$1N9021 on Bottom Layer (solid, remove dead copper, pour order 304): 129.405,106.187 129.405,103.178 130.935,101.648 130.935,93.31 132.543,93.31 132.567,93.335 132.567,101.546 130.935,103.178 130.935,104.81 130.986,104.861 129.66,106.187
$4N1398 on Top Layer (solid, remove dead copper, pour order 66): 139.62,108.875 139.62,105.662 140.589,104.693 141.321,104.693 141.321,105.899 140.487,106.733 140.487,108.875
+5V on Bottom Layer (solid, remove dead copper, pour order 306): 130.833,187.686 133.077,187.686 133.281,187.482 133.281,182.382 135.066,182.382 135.117,182.433 135.117,188.91 134.658,189.369 130.884,189.369 130.782,189.267 130.782,187.737
P4_VCC on Top Layer (solid, remove dead copper, pour order 68): 142.425,108.824 141.252,108.824 141.252,106.376 141.303,106.325 142.374,106.325 142.425,106.274
+5V on Bottom Layer (solid, remove dead copper, pour order 308): 21 vertices, not listed, extent 76.263,124.598 85.494,177.792
$4N893 on Top Layer (solid, remove dead copper, pour order 70): 148.662,110.987 147.504,110.987 147.474,111.017 147.474,110.354 147.78,110.048 148.545,110.048 148.596,110.099 148.596,110.813 148.647,110.864 148.647,110.973
+5V on Bottom Layer (solid, remove dead copper, pour order 310): 85.188,152.597 85.698,152.087 86.973,152.087 87.279,151.781 87.279,149.996 87.126,149.843 85.698,149.843 85.392,149.537 85.188,149.741
$4N908 on Top Layer (solid, remove dead copper, pour order 72): 150.279,107.294 150.279,108.518 148.851,108.518 148.8,108.467 148.8,107.906 149.412,107.294
VCC on Bottom Layer (solid, remove dead copper, pour order 312): 88.804,135.974 88.809,135.98 88.809,142.295 90.747,142.295 90.798,142.244 90.798,135.665 90.747,135.614 89.013,135.614 88.804,135.824
P4_METAL_ADC on Top Layer (solid, remove dead copper, pour order 74): 143.088,108.569 143.088,106.274 143.79,106.274 144.18,105.884 144.192,105.884 144.363,105.713 144.669,105.713 144.771,105.611 144.771,106.226 144.006,106.991 144.006,108.569
VCC on Bottom Layer (solid, remove dead copper, pour order 314): 25 vertices, not listed, extent 96.102,141.02 99.876,178.117
P4_VCC on Top Layer (solid, remove dead copper, pour order 76): 141.252,106.427 141.456,106.223 141.456,106.019 141.558,105.917 141.558,105.764 142.571,105.764 142.571,106.18 142.221,106.529 142.221,106.58 141.405,106.58
VCC on Bottom Layer (solid, remove dead copper, pour order 316): 127.62,135.206 127.62,137.909 127.052,138.477 127.052,148.357 127.212,148.517 128.232,148.517 128.487,148.772 128.793,148.772 128.793,137.042 129.456,136.379 129.456,134.543 128.283,134.543
P4_VCC on Top Layer (solid, remove dead copper, pour order 78): 147.168,99.185 147.168,102.5 147.066,102.602 145.514,102.602 145.514,99.162 145.485,99.134 147.117,99.134
VCC on Bottom Layer (solid, remove dead copper, pour order 318): 118.695,145.559 118.695,144.182 118.848,144.029 120.123,144.029 120.174,143.978 120.174,145.151 119.868,145.457 119.358,145.457 119.154,145.662 118.798,145.662
P4_GND on Top Layer (solid, remove dead copper, pour order 80): 149.361,103.673 149.361,102.551 150.14,102.551 150.534,102.156 150.752,102.156 150.84,102.245 150.84,102.704 150.33,103.214 150.33,103.673
GND on Bottom Layer (solid, remove dead copper, pour order 320): 76.312,197.682 76.312,91.65 136.341,91.65 136.341,197.682
P4_GND on Top Layer (solid, remove dead copper, pour order 82): 153.237,103.52 154.002,103.52 154.105,103.418 154.105,102.857 154.053,102.806 153.237,102.806 153.186,102.857 153.186,103.469
P4_GND on Top Layer (solid, remove dead copper, pour order 84): 152.421,109.436 152.421,107.935 152.071,107.585 152.071,106.944 152.064,106.937 152.829,106.937 153.747,107.855 153.747,110.813 153.696,110.864 153.692,110.859 152.792,110.859 152.778,110.845 152.778,109.659 152.555,109.436
P4_GND on Top Layer (solid, remove dead copper, pour order 86): 148.392,108.11 145.995,108.11 145.995,107.388 148.385,107.388 148.443,107.447 148.392,107.498
P4_GND on Top Layer (solid, remove dead copper, pour order 88): 144.072,105.53 141.529,105.53 141.507,105.509 141.507,104.693 144.006,104.693 144.072,104.758
P4_GND on Top Layer (solid, remove dead copper, pour order 90): 142.476,103.928 141.099,103.928 140.742,103.571 140.742,102.398 140.784,102.356 142.493,102.356 142.493,103.911
USB+ on Top Layer (solid, remove dead copper, pour order 92): 30 vertices, not listed, extent 140.102,129.3 149.741,140.979
$5N401 on Top Layer (solid, remove dead copper, pour order 94): 17 vertices, not listed, extent 150.753,129.377 156.779,137.409
$5N399 on Top Layer (solid, remove dead copper, pour order 96): 18 vertices, not listed, extent 152.954,134.349 156.83,139.09
USB- on Top Layer (solid, remove dead copper, pour order 98): 160.247,129.657 160.247,136.338 158.054,138.531 158.054,141.081 156.575,141.081 156.524,141.132 156.524,137.817 158.054,136.287 158.054,129.657
VBIN on Top Layer (solid, remove dead copper, pour order 100): 18 vertices, not listed, extent 152.954,139.704 160.808,146.939
USB- on Top Layer (solid, remove dead copper, pour order 102): 17 vertices, not listed, extent 146.783,136.083 153.005,141.183
USB- on Top Layer (solid, remove dead copper, pour order 104): 141.428,141.132 143.213,141.132 143.978,141.897 143.978,145.722 144.284,146.028 148.568,146.028 148.568,146.029 148.568,146.844 141.53,146.844 141.428,146.742
USB- on Top Layer (solid, remove dead copper, pour order 106): 152.546,145.977 156.116,145.977 156.218,146.079 156.218,146.946 152.597,146.946 152.546,146.895
USB- on Top Layer (solid, remove dead copper, pour order 108): 141.326,136.695 143.06,136.695 143.825,135.93 143.825,132.615 141.318,132.615 141.318,136.688
P6_3V3 on Top Layer (solid, remove dead copper, pour order 110): 118.124,85.024 117.359,85.024 116.798,84.463 115.702,84.463 115.702,83.545 117.869,83.545 118.124,83.8
P6_GND on Top Layer (solid, remove dead copper, pour order 112): 116.39,84.673 116.704,84.673 117.616,85.585 118.124,85.585 118.124,88.167 115.491,88.167 115.472,88.186 115.472,87.325 116.506,87.325 116.654,87.472 117.328,87.472 117.328,86.625 117.155,86.452 117.155,86.201 116.39,85.436
$7N310 on Top Layer (solid, remove dead copper, pour order 114): 114.452,85.687 114.452,87.013 114.758,87.319 114.809,87.319 114.809,88.198 113.751,88.198 113.751,85.929 113.993,85.687
P6_3V3 on Top Layer (solid, remove dead copper, pour order 116): 19 vertices, not listed, extent 111.596,84.674 114.436,87.064
P6_GND on Top Layer (solid, remove dead copper, pour order 118): 114.439,84.317 114.153,84.317 113.993,84.157 110.994,84.157 110.994,85.156 112.331,85.156 113.024,84.463 114.293,84.463
P6_GND on Top Layer (solid, remove dead copper, pour order 120): 112.353,84.317 112.052,84.015 112.052,83.09 110.878,83.09 110.831,83.137 110.831,84.973 110.933,85.075 111.545,85.075 111.596,85.024 111.646,85.024
P6_3V3 on Top Layer (solid, remove dead copper, pour order 122): 114.503,81.505 114.503,83.086 114.452,83.086 114.299,83.239 112.973,83.239 112.871,83.137 112.871,82.27 113.636,81.505
P6_GND on Top Layer (solid, remove dead copper, pour order 124): 117.637,85.594 119.026,85.594 119.026,88.623 115.501,88.623 115.421,88.543 115.421,87.37 115.472,87.319 117.257,87.319 117.308,87.268 117.308,86.197 117.206,86.095 117.206,86.025
MIC_VCC on Top Layer (solid, remove dead copper, pour order 126): 101.795,84.878 101.795,85.49 101.846,85.541 101.846,86.547 99.079,86.547 99.079,85.248 99.194,85.133 100.367,85.133 100.469,85.031 100.52,85.031 100.696,84.855 101.772,84.855
$2N897 on Top Layer (solid, remove dead copper, pour order 128): 102.407,82.991 99.398,82.991 99.398,82.124 102.407,82.124
$2N810 on Top Layer (solid, remove dead copper, pour order 130): 98.633,82.991 98.633,86.51 97.592,86.51 97.592,84.092 97.409,83.909 97.409,83.006 97.424,82.991
$2N709 on Top Layer (solid, remove dead copper, pour order 132): 101.846,88.244 97.562,88.244 97.562,87.252 100.293,87.252 100.469,87.428 101.795,87.428 101.846,87.479
$2N358 on Top Layer (solid, remove dead copper, pour order 134): 20 vertices, not listed, extent 102.56,83.858 105.314,88.097
MIC_GND on Top Layer (solid, remove dead copper, pour order 136): 107.903,80.927 107.903,88.681 105.891,88.681 105.891,80.935 105.977,80.849 106.055,80.927